# Altium PCB wrist_pcb.PcbDoc
Units mil, origin at the board's own origin, x right, y up, seen from the top; angles counter-clockwise.
Board outline 6000 x 4000 mil, 2 copper layers (Top Layer, Bottom Layer); 4 components, 0 nets, 23 pads, 0 vias.
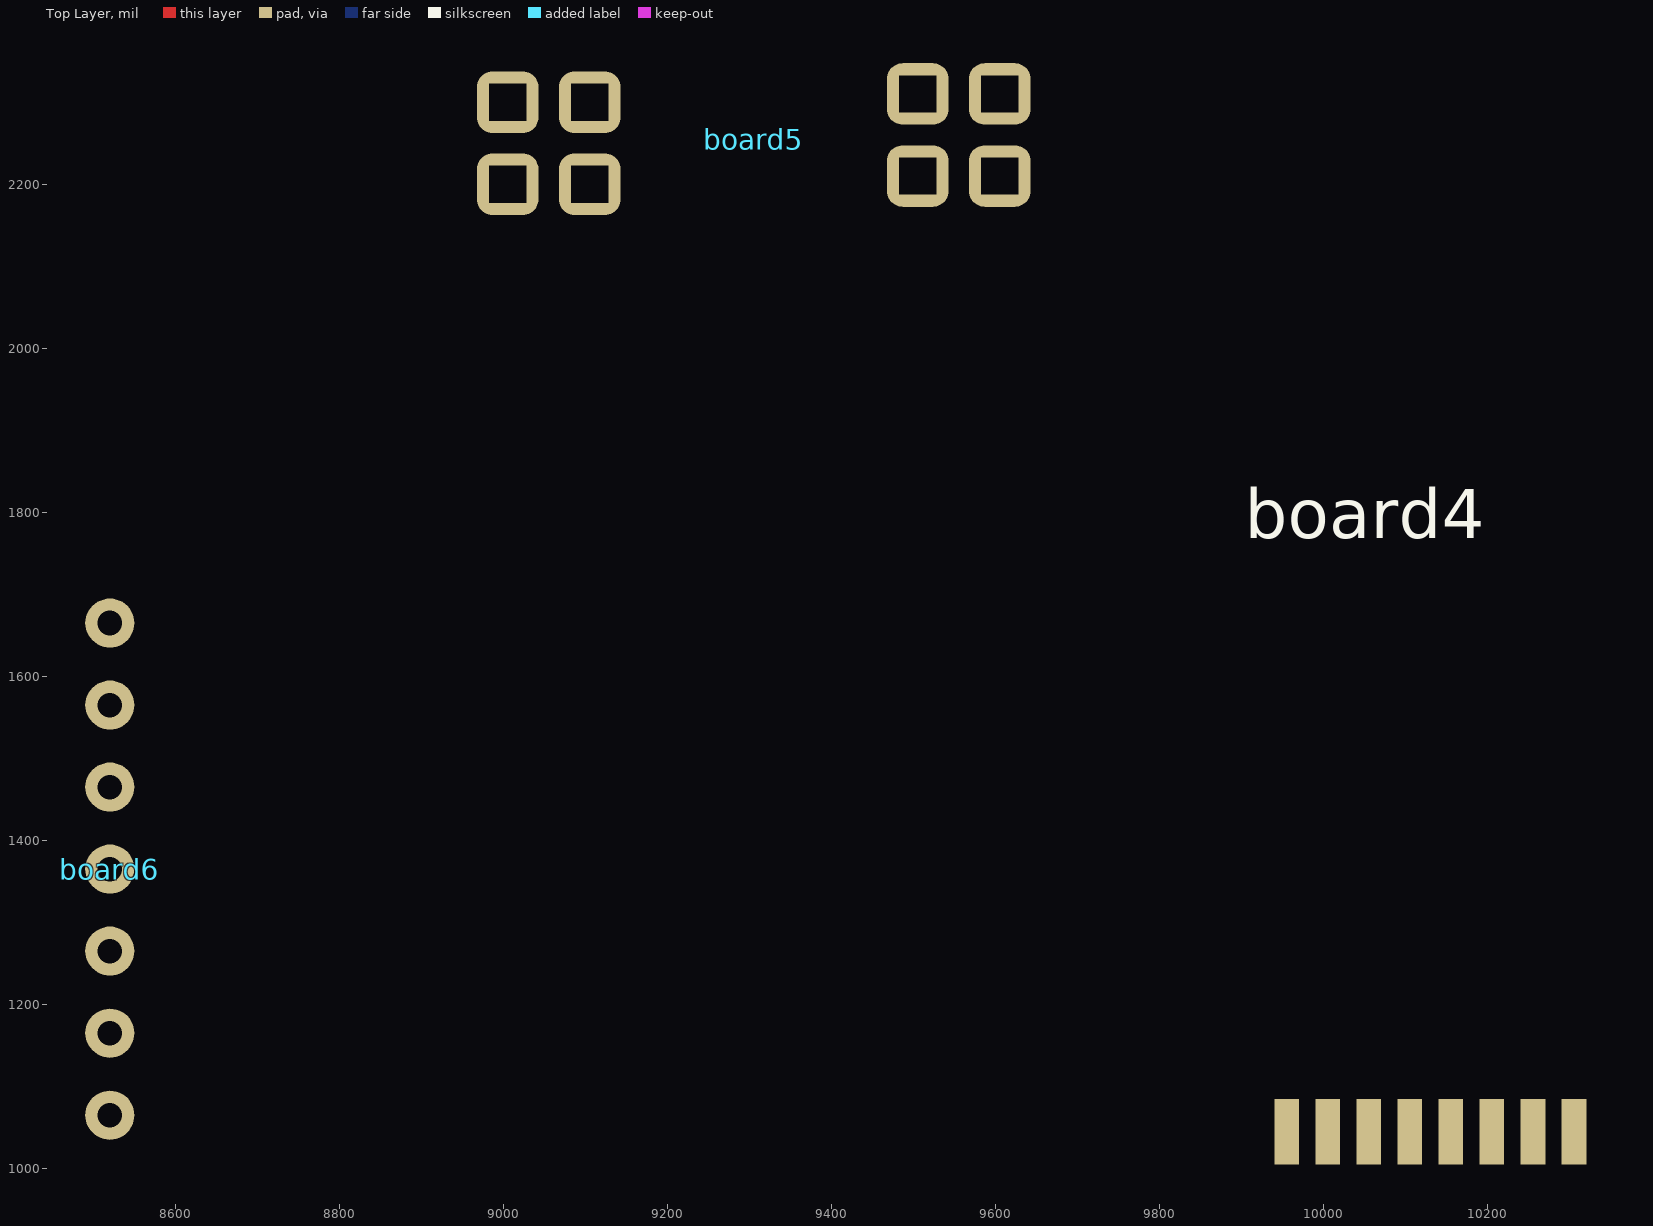
[diagram p0: Top Layer view]
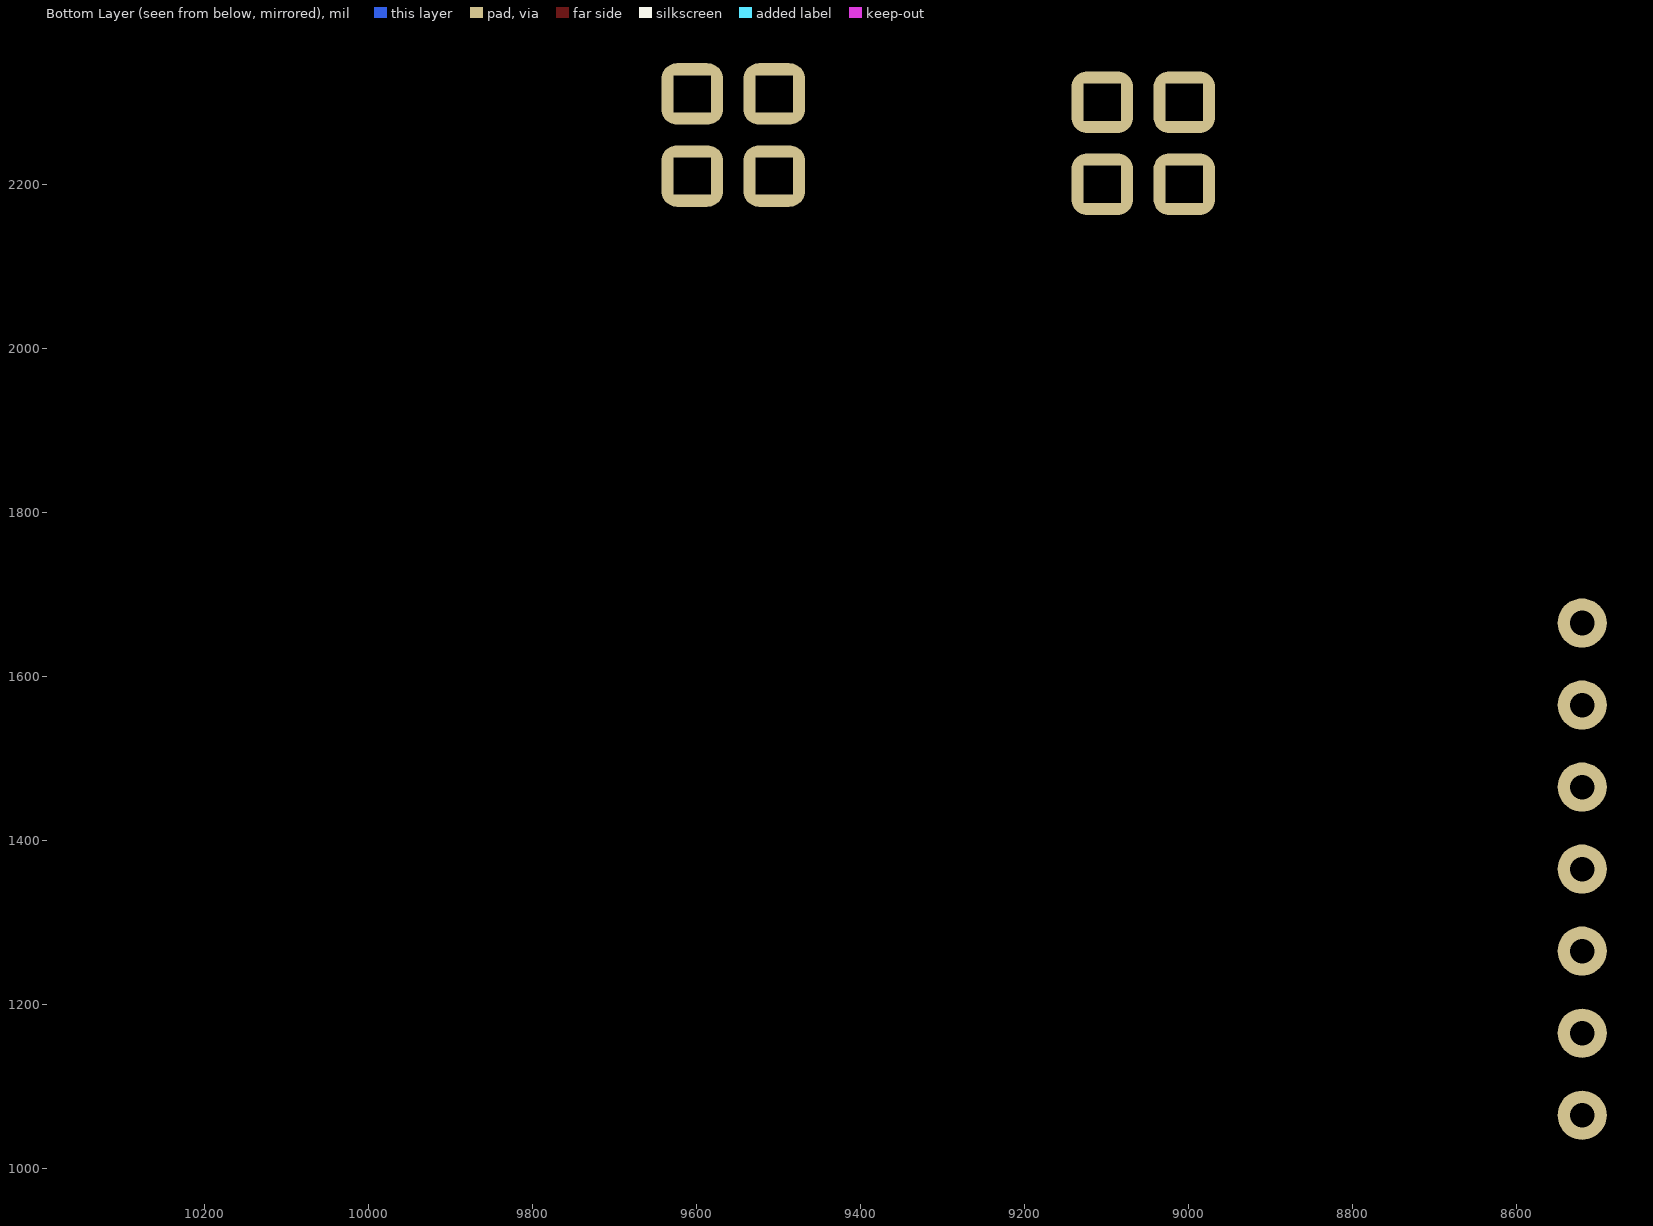
[diagram p1: Bottom Layer view, seen from below]

## Layer stack, top to bottom
Top Solder: solder mask 0.4, Solder Resist, Dk 3.5
Top Layer: signal copper 1.4
Dielectric 1: dielectric 12.6, FR-4, Dk 4.8
Bottom Layer: signal copper 1.4
Bottom Solder: solder mask 0.4, Solder Resist, Dk 3.5

## Board outline
1000,1000 7000,1000 7000,5000 1000,5000

## Design rules (kind name [scope] priority, off if disabled: settings)
Clearance [All] p1: gap=10 ignorepadtopadclearanceinfootprint=FALSE
PolygonConnect [All] p1: connectstyle=Relief reliefconductorwidth=10 reliefentries=4 polygonreliefangle="90 Angle" airgapwidth=10
RoutingVias [All] p1: holewidth=28 width=50 viastyle="Through Hole" minholewidth=28 minwidth=50 maxholewidth=28 maxwidth=50
SolderMaskExpansion [All] p1: expansion=4 istentingtop=FALSE
Width [All] p1: maxlimit=10 minlimit=10 preferedwidth=10
30 further rules are at their usual default settings.

## Components (designator, comment, footprint, x,y, rotation, side; value= is the part's Value field where it differs from the comment)
board4 "NRF24" nrf24 10130,1030 r0 top
board5 "SD" sd 9405,2110 r0 top
board6 "MAX30102" max30102 8650,1365 r90 top
board7 "Adafruit_Feather_STM32F405" Adafruit_Feather_STM32F405 8915,795 r90 top

## Footprints (in the part's own frame and the unit in brackets; to place one, negate y for a bottom-side part, rotate by r counter-clockwise, add the part's x,y. Pads: shape width x height; smd on the part's side, far side on the other; paste and mask are expansions set on the pad)
Adafruit_Feather_STM32F405 [mil]
  body extent -236,-179 1810,730, height 150
max30102 [mil]
  round 60 hole 30: 1(-300,130) 2(-200,130) 3(-100,130) 4(0,130) 5(100,130) 6(200,130) 7(300,130)
  body extent -364,75 364,638, height 130
nrf24 [mil]
  rect 30x80 smd: 1(-175,15) 2(-125,15) 3(-75,15) 4(-25,15) 5(25,15) 6(75,15) 7(125,15) 8(175,15)
  body extent -236,0 236,709, height 89
sd [mil]
  rrect50% 75x75 hole 45 square: 1(-400,190) 2(-300,190) 3(-400,90) 4(-300,90) 5(100,200) 6(100,100) 7(200,200) 8(200,100)
  body extent -610,0 610,2028, height 178

## Nets (pads, with @x,y where several pads share a name; then routed paths per layer and width w, separated by ;. In a path a pad name is that pad's centre, name@x,y a point inside that pad or via, vN(x,y) a via of type N, cw(c..) or ccw(c..) an arc to the next point about the centre after c; other vN are vias at no path point)
pads on no net: board4.1 board4.2 board4.3 board4.4 board4.5 board4.6 board4.7 board4.8 board5.1 board5.2 board5.3 board5.4 board5.5 board5.6 board5.7 board5.8 board6.1 board6.2 board6.3 board6.4 board6.5 board6.6 board6.7